# Altium PCB PCB.PcbDoc
Units mil, origin at the board's own origin, x right, y up, seen from the top; angles counter-clockwise.
Board outline 2480 x 2340 mil, 2 copper layers (Top Layer, Bottom Layer); 22 components, 21 nets, 82 pads, 0 vias.
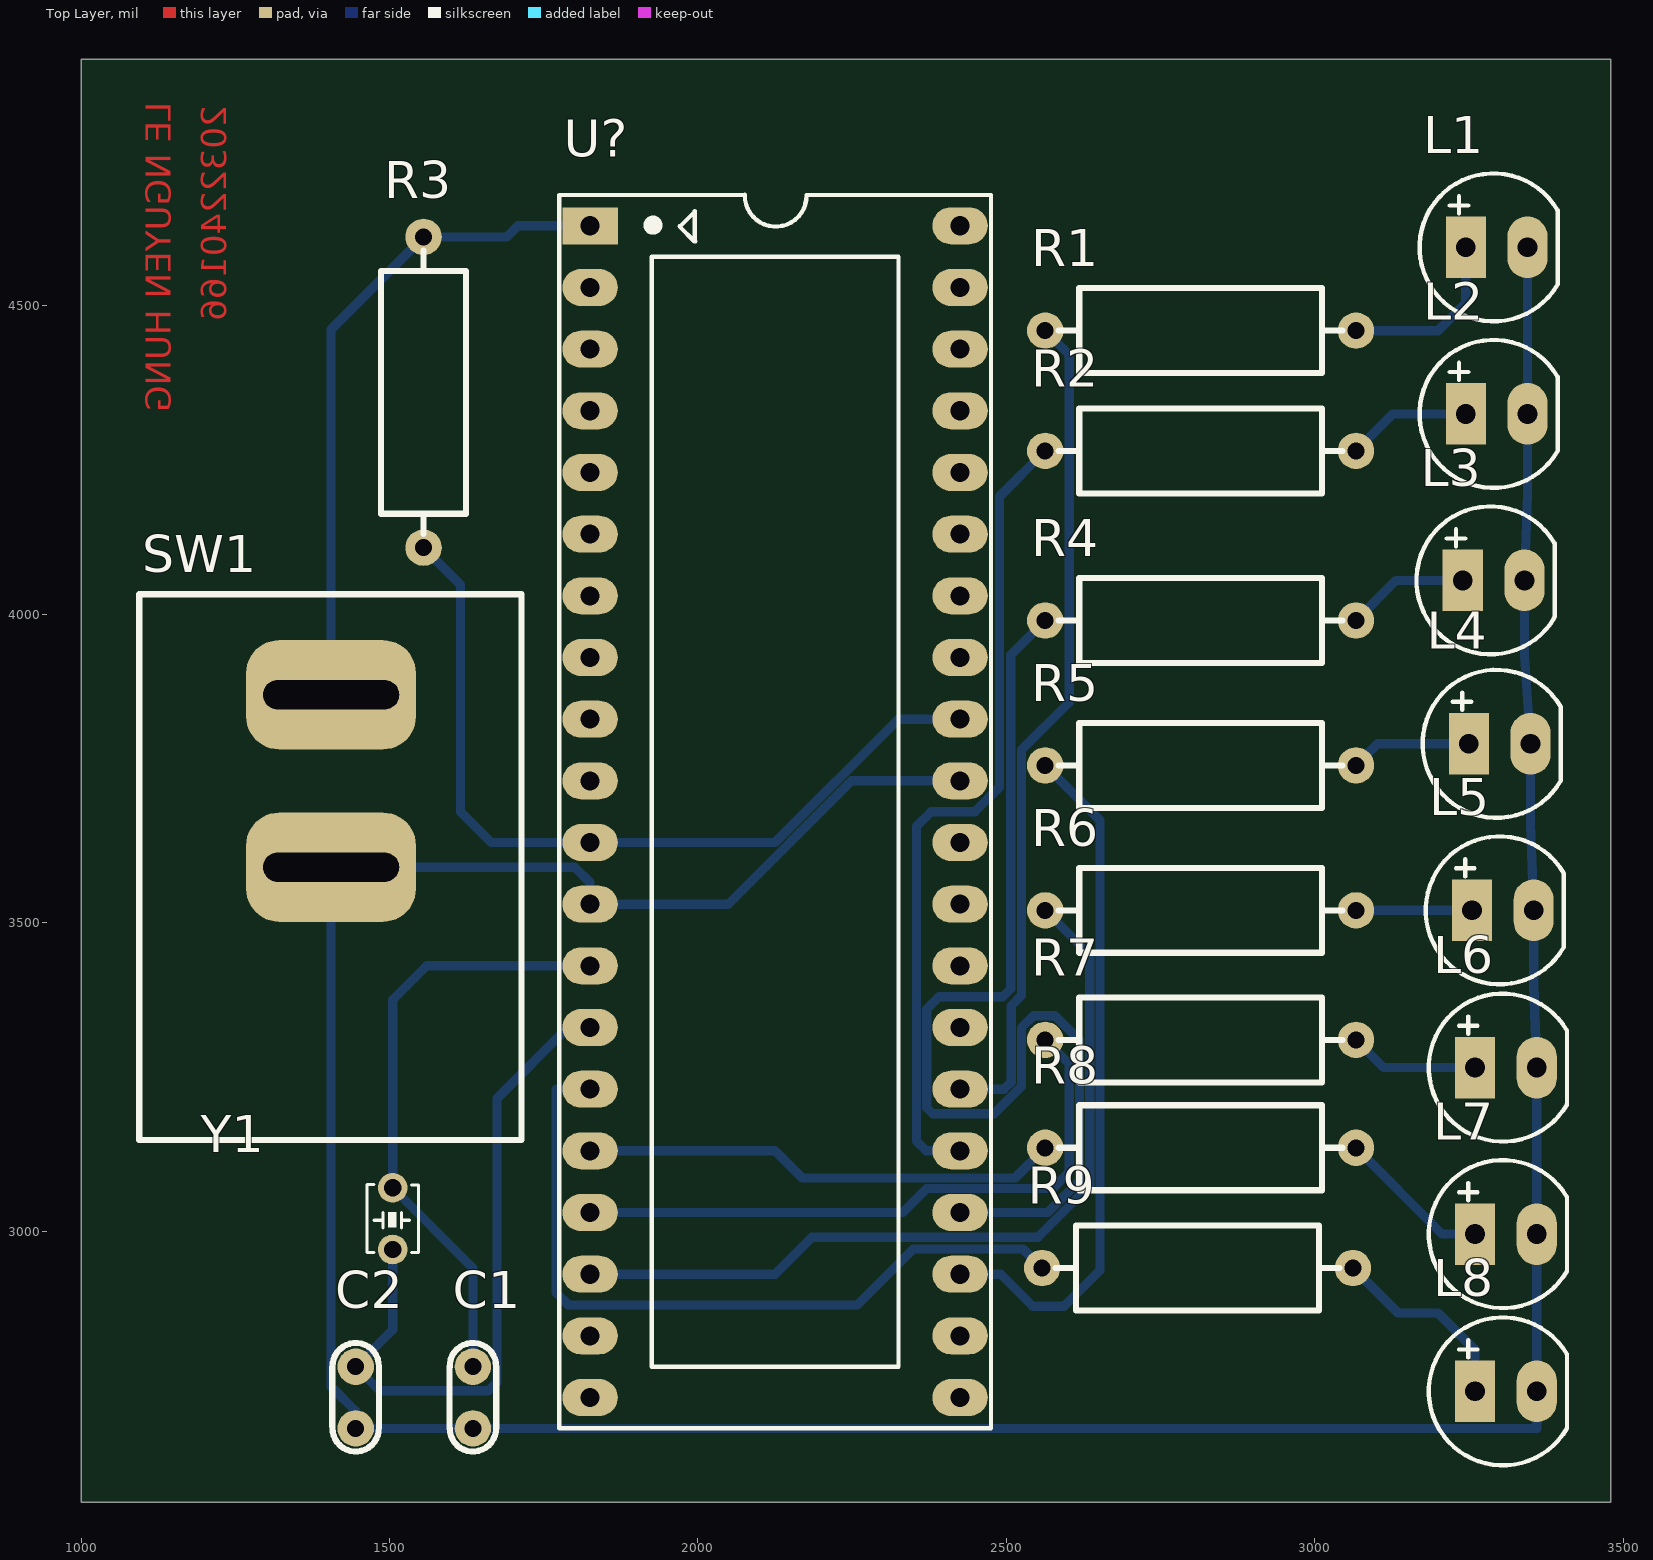
[diagram p0: Top Layer view]
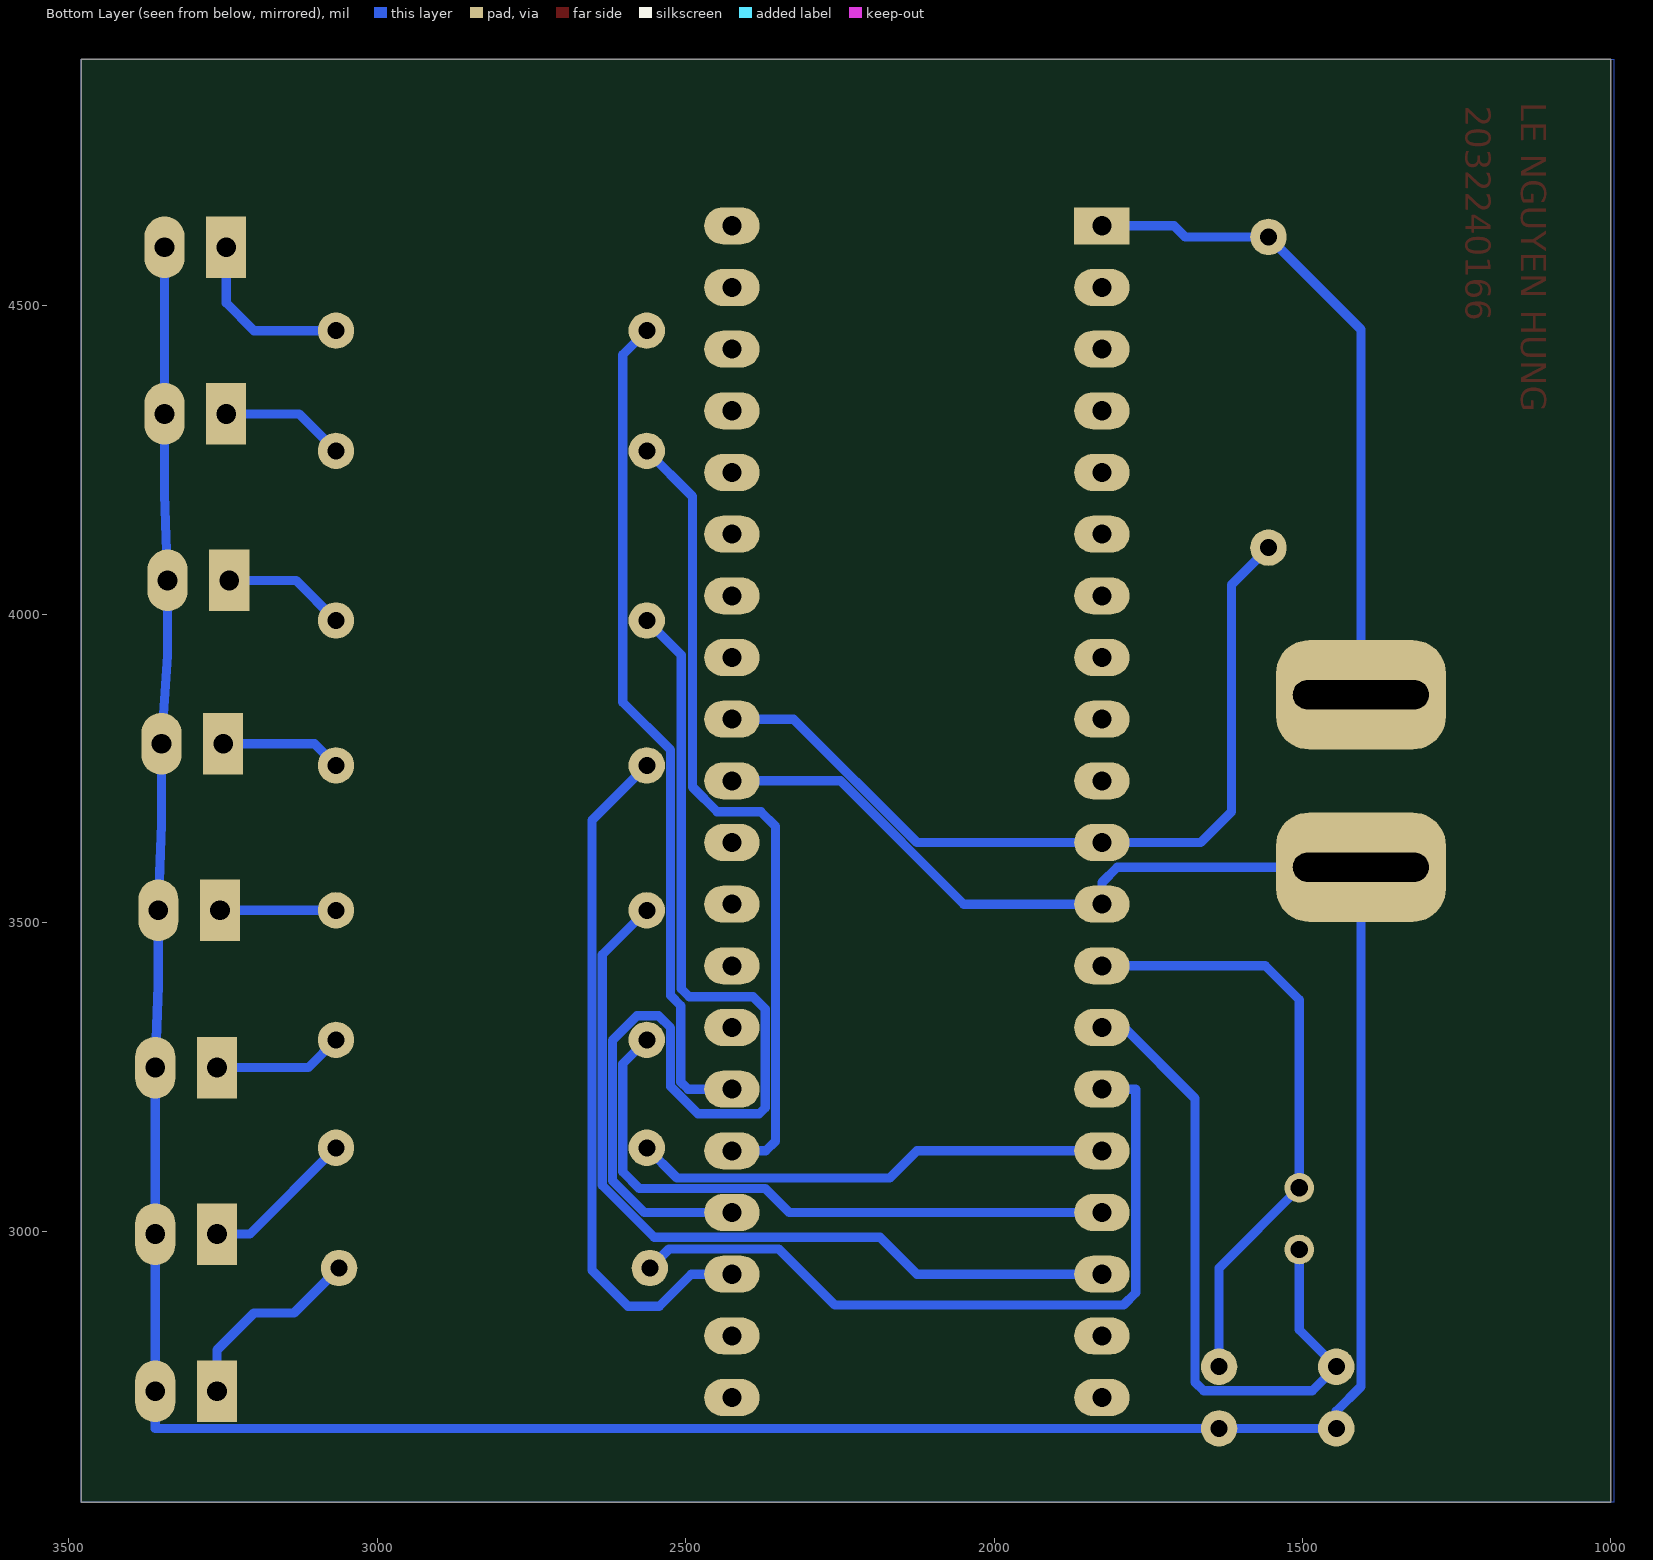
[diagram p1: Bottom Layer view, seen from below]
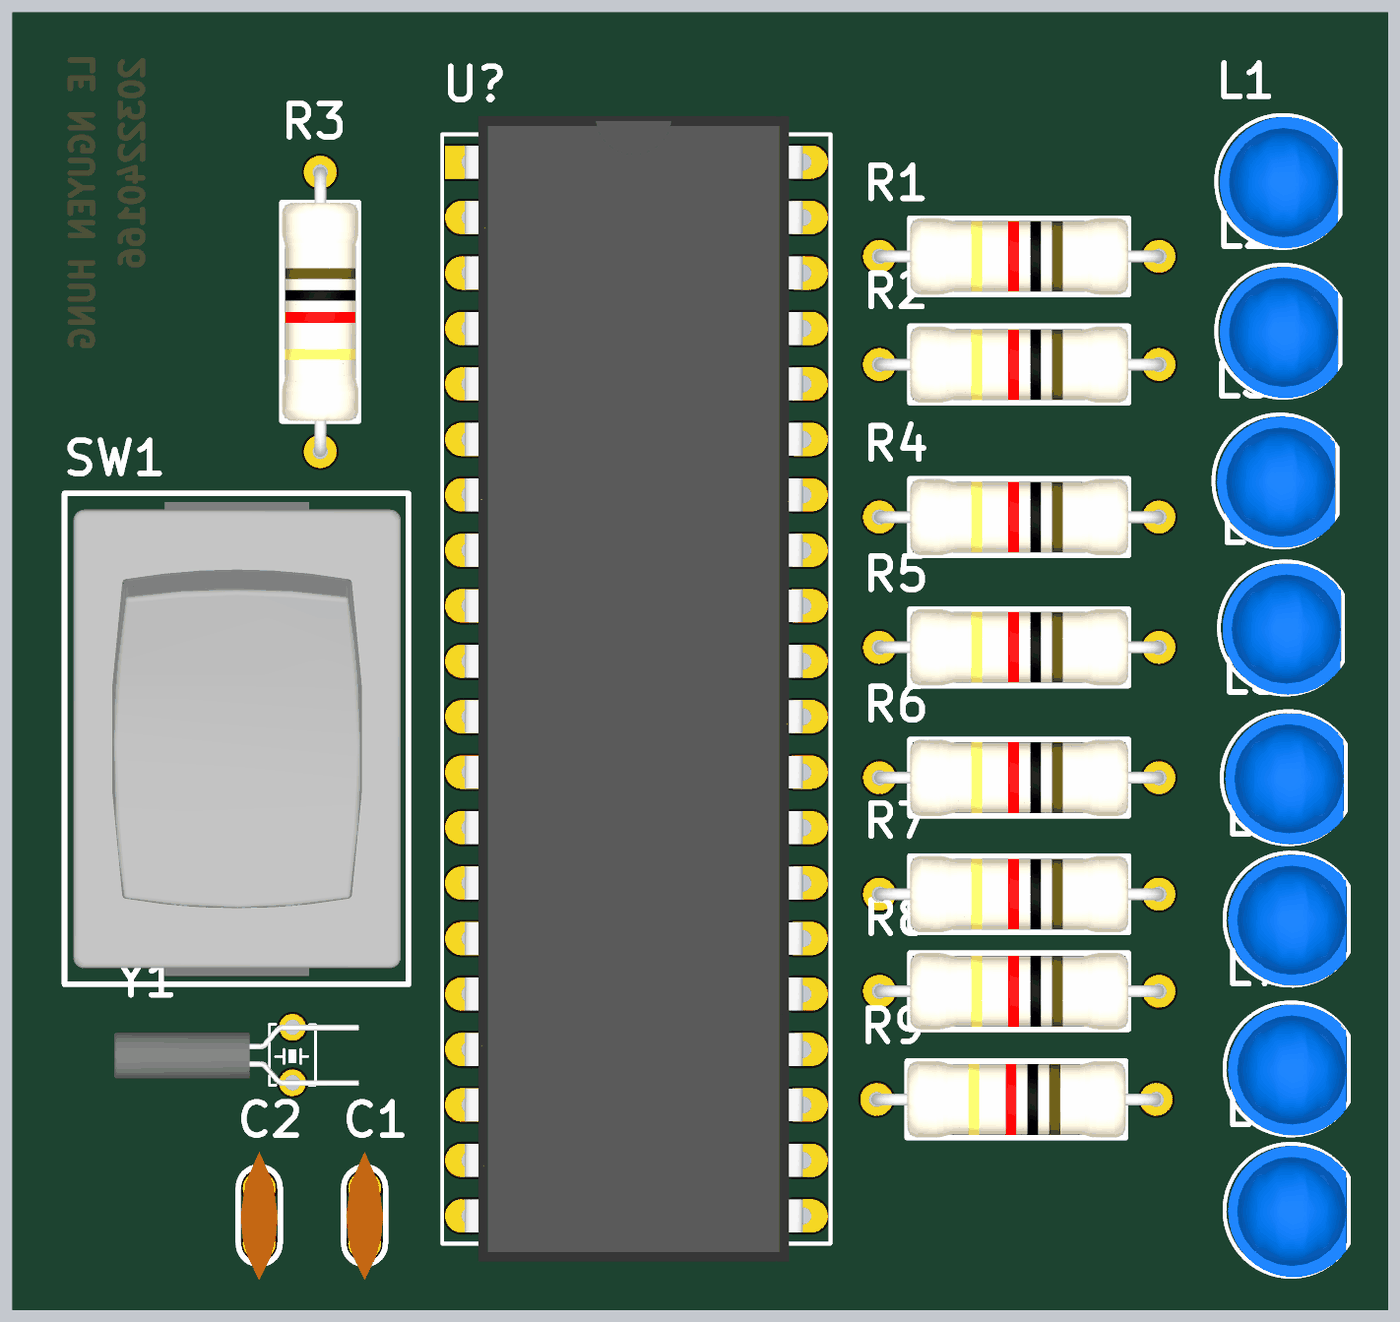
[diagram p2: 3D render of the assembled board from above, using the file's embedded part models]

## Layer stack, top to bottom
Top Solder: solder mask 0.4, Solder Resist, Dk 3.5
Top Layer: signal copper 1.4
Dielectric 1: dielectric 12.6, FR-4, Dk 4.8
Bottom Layer: signal copper 1.4
Bottom Solder: solder mask 0.4, Solder Resist, Dk 3.5

## Board outline
1000,2560 3480,2560 3480,4900 1000,4900

## Design rules (kind name [scope] priority, off if disabled: settings)
Clearance [All] p1: gap=1.6 ignorepadtopadclearanceinfootprint=FALSE
PolygonConnect [All] p1: connectstyle=Relief reliefconductorwidth=10 reliefentries=4 polygonreliefangle="90 Angle" airgapwidth=10
RoutingLayers [All] p1: top layer_v5=FALSE bottom layer_v5=TRUE
RoutingVias [All] p1: holewidth=28 width=50 viastyle="Through Hole" minholewidth=28 minwidth=50 maxholewidth=28 maxwidth=50
SolderMaskExpansion [All] p1: expansion=4 istentingtop=FALSE
SupplyNets "Schematic Supply Nets_1" [InNet('+5')] p1: voltage=0.000
SupplyNets "Schematic Supply Nets" [InNet('GND')] p2: voltage=0.000
Width [All] p1: maxlimit=15 minlimit=15 preferedwidth=15 minimp=50.000000 maximp=50.000000 favimp=50.000000
29 further rules are at their usual default settings.

## Components (designator, comment, footprint, x,y, rotation, side; value= is the part's Value field where it differs from the comment)
C1 "30pF" "tu gom" 1635,2730 r270 top
C2 "30pF" "tu gom" 1445,2730 r270 top
L1 "LED 5mm" LED-5MM-BLUE 3290,4595 r0 top
L2 "LED 5mm" LED-5MM-BLUE 3290,4325 r0 top
L3 "LED 5mm" LED-5MM-BLUE 3285,4055 r0 top
L4 "LED 5mm" LED-5MM-BLUE 3295,3790 r0 top
L5 "LED 5mm" LED-5MM-BLUE 3300,3520 r0 top
L6 "LED 5mm" LED-5MM-BLUE 3305,3265 r0 top
L7 "LED 5mm" LED-5MM-BLUE 3305,2995 r0 top
L8 "LED 5mm" LED-5MM-BLUE 3305,2740 r0 top
R1 "330k" "tro vach 1/2w" 2815,4460 r180 top
R2 "330k" "tro vach 1/2w" 2815,4265 r180 top
R3 "10k" "tro vach 1/2w" 1555,4360 r270 top
R4 "330k" "tro vach 1/2w" 2815,3990 r180 top
R5 "330k" "tro vach 1/2w" 2815,3755 r180 top
R6 "330k" "tro vach 1/2w" 2815,3520 r180 top
R7 "330k" "tro vach 1/2w" 2815,3310 r180 top
R8 "330k" "tro vach 1/2w" 2815,3135 r180 top
R9 "330k" "tro vach 1/2w" 2810,2940 r180 top
SW1 "SWITCH 10A-2PIN" SW_2ARS_TH 1404,3867.53 r0 top
U? "PIC16F887-PU" DIP40/W0.6 1825,4630 r270 top
Y1 "16Mhz" "Thach Anh 2 Chan 32,768 KHz" 1505,2970 r180 top value=4Mhz

## Footprints (in the part's own frame and the unit in brackets; to place one, negate y for a bottom-side part, rotate by r counter-clockwise, add the part's x,y. Pads: shape width x height; smd on the part's side, far side on the other; paste and mask are expansions set on the pad)
DIP40/W0.6 [mil] "40 PIN, W 600mil, Pin to pin 100mil"
  rect 60x90 hole 31: 1(0,0)
  oval 60x90 hole 31: 2(100,0) 3(200,0) 4(300,0) 5(400,0) 6(500,0) 7(600,0) 8(700,0) 9(800,0) 10(900,0) 11(1000,0) 12(1100,0) 13(1200,0) 14(1300,0) 15(1400,0) 16(1500,0) 17(1600,0) 18(1700,0) 19(1800,0) 20(1900,0) 21(1900,600) 22(1800,600) 23(1700,600) 24(1600,600) 25(1500,600) 26(1400,600) 27(1300,600) 28(1200,600) 29(1100,600) 30(1000,600) 31(900,600) 32(800,600) 33(700,600) 34(600,600) 35(500,600) 36(400,600) 37(300,600) 38(200,600) 39(100,600) 40(0,600)
  silkscreen extent -50,-50 1950,650, body extent -82,-10 1982,600, height 224
LED-5MM-BLUE [mil] "LED 2 PIN, 5 ly , Only colour, pin to pin 110mil"
  rect 65x100 hole 32: 1(-45,0)
  oval 65x100 hole 32: 2(55,0)
  silkscreen extent -120,-120 104,120, body extent -113,-120 100,117, height 339
SW_2ARS_TH [mm] "CASE: TH"
  rrect60% 7x4.5 hole 1.2 slot 5.6 at 0 deg mask+0.076: 1(0.025,0.051) 2(0.025,-7.049)
  silkscreen extent -7.87,-18.29 7.87,4.19, body extent -7.47,-17.9 7.53,3.8, height 17.81
"Thach Anh 2 Chan 32,768 KHz" [mil]
  round 48 hole 28: 1(0,0) 2(0,-100)
  silkscreen extent -42,-106 42,5, body extent -120,-105 321,6, height 66
"tro vach 1/2w" [mm]
  round 1.5 hole 0.7: 1(-6.4,0) 2(6.4,0)
  silkscreen extent -5.84,-1.75 5.84,1.75, body extent -6.62,-1.75 6.62,1.75, height 3.5
"tu gom" [mm] "Tu gom mini"
  round 1.5 hole 0.7: 1(-1.27,0) 2(1.27,0)
  silkscreen extent -2.25,-0.97 2.22,0.97, body extent -2.92,-0.85 2.92,0.85, height 6.12

## Part data
C1 C2: library part "Tu gom 30pF 50V", "Cắm", Chung_Loai=Cắm, Don_Vi=Con, Ma_Hang=MH004772, So_Chan=2, Ten_Linh_Kien="Tụ gốm 30P"
L1 L2 L3 L4 L5 L6 L7 L8: library part "LED 5mm Xanh Duong", "Cắm", Chung_Loai=Cắm, Don_Vi=Con, Ma_Hang=MH008987, Ten_Linh_Kien="Led 5MM Xanh Dương Đục (1000c)"
R1 R2 R4 R5 R6 R7 R8 R9: library part "Tro Vach 1/2W 5% 330k", "Cắm", Chung_Loai=Cắm, Don_Vi=Con, Ma_Hang=MH006196, So_Chan=2, Ten_Linh_Kien="Trở 5% 1/2w 330k"
R3: library part "Tro Vach 1/2W 5% 10k", "Cắm", Chung_Loai=Cắm, Don_Vi=Con, Ma_Hang=MH006206, So_Chan=2, Ten_Linh_Kien="Trở 5% 1/2w 10k"
SW1: library part SW1_RS-471005264153-TH, "Rocker Switch SPST 16A (AC), 10A (DC) 250V Panel Mount, Snap-In", Alternate Part Number-1=NA, Case/Package=TH, Manufacturer="Würth Elektronik", Manufacturer Part Number=471005264153, Supplier Part Number-1=471005264153, Supplier-1="Würth Elektronik"
U?: "Flash-Based, 8-Bit CMOS Microcontroller with nanoWatt Technology, 8K (x14-Bit words) Program Memory, 624 Bytes Data Memory, 35 I/O pins, 40-Pin PDIP, Standard VDD Range, Extended Temperature", Supplier Part Number 1=PIC16F887-E/P-ND, ComponentLink1Description=Datasheet, ComponentLink1URL=http://ww1.microchip.com/downloads/en/DeviceDoc/41291F.pdf, ComponentLink2Description="Packaging Specification", ComponentLink2URL=http://www.microchip.com/stellent/groups/techpub_sg/documents/packagingspec/en012702.pdf, ComponentLink3Description="Microchip.com Home", ComponentLink3URL=http://www.microchip.com/, DatasheetVersion="revF, Apr-2009", LatestRevisionDate=02-Dec-2009, LatestRevisionNote="Updated datasheet to version revF, Apr-2009.", PackageDescription="40-Lead Plastic Dual In-Line (P) - 600 mil Body [PDIP]", PackageReference=PDIP600-P40, PackageVersion="revBB, Aug-2009", Published=29-Jan-2009, Publisher="Altium Limited", Supplier 1=Digi-Key, Supplier 2=Farnell, Supplier Part Number 2=1703423
Y1: library part "Thach Anh 2 chan 32,768 Khz", "Crystal For all Crystal 2pin."

## Nets (pads, with @x,y where several pads share a name; then routed paths per layer and width w, separated by ;. In a path a pad name is that pad's centre, name@x,y a point inside that pad or via, vN(x,y) a via of type N, cw(c..) or ccw(c..) an arc to the next point about the centre after c; other vN are vias at no path point)
+5: R3.2 U?.11 U?.32 | length 1366.4
  Bottom Layer w15: R3.2 1615,4048.03 1615,3680 1665,3630 U?.11 2125,3630 2325,3830 U?.32
D1: R1.2 U?.26 | length 1361
  Bottom Layer w15: U?.26 2496,3230 2507.8,3241.8 2507.8,3365.23 2524.4,3381.83 2524.4,3780 2602,3857.6 2602,4421.03 R1.2
D2: R2.2 U?.25 | length 1324.6
  Bottom Layer w15: U?.25 2370,3130 2354.3,3145.7 2354.3,3656.3 2378,3680 2449,3680 2489,3720 2489,4190.97 R2.2
D3: R4.2 U?.24 | length 1762.5
  Bottom Layer w15: U?.24 2567,3030 2618.6,3081.6 2618.6,3309.4 2579,3349 2544,3349 2524.4,3329.4 2524.4,3234.4 2480,3190 2380.9,3190 2370.9,3200 2370.9,3360 2390.9,3380 2494,3380 2507,3393 2507,3933.97 R4.2
D4: R5.2 U?.23 | length 1127.6
  Bottom Layer w15: U?.23 2491,2930 2542.8,2878.2 2593.4,2878.2 2651.8,2936.6 2651.8,3666.23 R5.2
D5: R6.2 U?.18 | length 1345.6
  Bottom Layer w15: U?.18 2125,2930 2185,2990 2551,2990 2635.2,3074.2 2635.2,3447.83 R6.2
D6: R7.2 U?.17 | length 1034.5
  Bottom Layer w15: U?.17 2331.9,3030 2371,3069.1 2575.1,3069.1 2602,3096 2602,3271.03 R7.2
D7: R8.2 U?.16 | length 776.6
  Bottom Layer w15: U?.16 2125,3130 2169,3086 2514.03,3086 R8.2
D8: R9.2 U?.15 | length 1231.9
  Bottom Layer w15: U?.15 1770,3230 1770,2900 1790,2880 2258,2880 2349,2971 2527.03,2971 R9.2
GND: C1.2 C2.2 L1.2 L2.2 L3.2 L4.2 L5.2 L6.2 L7.2 L8.2 SW1.2 U?.12 U?.31 | length 5905.4
  Bottom Layer w15: U?.31 2249,3730 2049,3530 U?.12 1825,3565 1800,3590 SW1.2 1405,2748 1445,2708 C2.2 1540,2680 C1.2 3360,2680 L8.2 L7.2 L6.2 3355,3398 L5.2 3350,3660 L4.2 3340,3933 L3.2 3345,4195 L2.2 L1.2
NetC1_1: C1.1 U?.13 Y1.2 | length 991.6
  Bottom Layer w15: C1.1 1635,2940 Y1.2 1505,3375 1560,3430 U?.13
NetC2_1: C2.1 U?.14 Y1.1 | length 1124.4
  Bottom Layer w15: Y1.1 1505,2840 C2.1 1484,2741 1660,2741 1674,2755 1674,3215 1789,3330 U?.14
NetL1_1: L1.1 R1.1 | length 286.7
  Bottom Layer w15: R1.1 3200,4460 3245,4505 L1.1
NetL2_1: L2.1 R2.1 | length 202.9
  Bottom Layer w15: R2.1 3126.97,4325 L2.1
NetL3_1: L3.1 R4.1 | length 200
  Bottom Layer w15: R4.1 3131.97,4055 L3.1
NetL4_1: L4.1 R5.1 | length 197.5
  Bottom Layer w15: R5.1 3101.97,3790 L4.1
NetL5_1: L5.1 R6.1 | length 188
  Bottom Layer w15: R6.1 L5.1
NetL6_1: L6.1 R7.1 | length 211.7
  Bottom Layer w15: R7.1 3111.97,3265 L6.1
NetL7_1: L7.1 R8.1 | length 251
  Bottom Layer w15: R8.1 3206.97,2995 L7.1
NetL8_1: L8.1 R9.1 | length 320.1
  Bottom Layer w15: R9.1 3134.97,2867 3200,2867 3260,2807 L8.1
NetR3_1: R3.1 SW1.1 U?.1 | length 1082
  Bottom Layer w15: SW1.1 1405,4461.97 R3.1 1690,4611.97 1708.03,4630 U?.1
pads on no net: U?.2 U?.3 U?.4 U?.5 U?.6 U?.7 U?.8 U?.9 U?.10 U?.19 U?.20 U?.21 U?.22 U?.27 U?.28 U?.29 U?.30 U?.33 U?.34 U?.35 U?.36 U?.37 U?.38 U?.39 U?.40

## Polygon pours and split planes (outlines as drawn)
GND on Bottom Layer "GND_L02_P001" (solid, pour order 1): 995,2560 3480,2560 3480,4900 995,4900

## Other copper
Top Layer:
  text "LE NGUYEN HUNG" at 1145,4830 h40 r90
  text "2032240166" at 1235,4825 h40 r90